# Altium PCB microPower.PcbDoc
Units mil, origin at the board's own origin, x right, y up, seen from the top; angles counter-clockwise.
Board outline 2715 x 2455 mil, 2 copper layers (Top Layer, Bottom Layer); 57 components, 58 nets, 178 pads, 17 vias.
Unrouted connection lines stored in the file: 19.
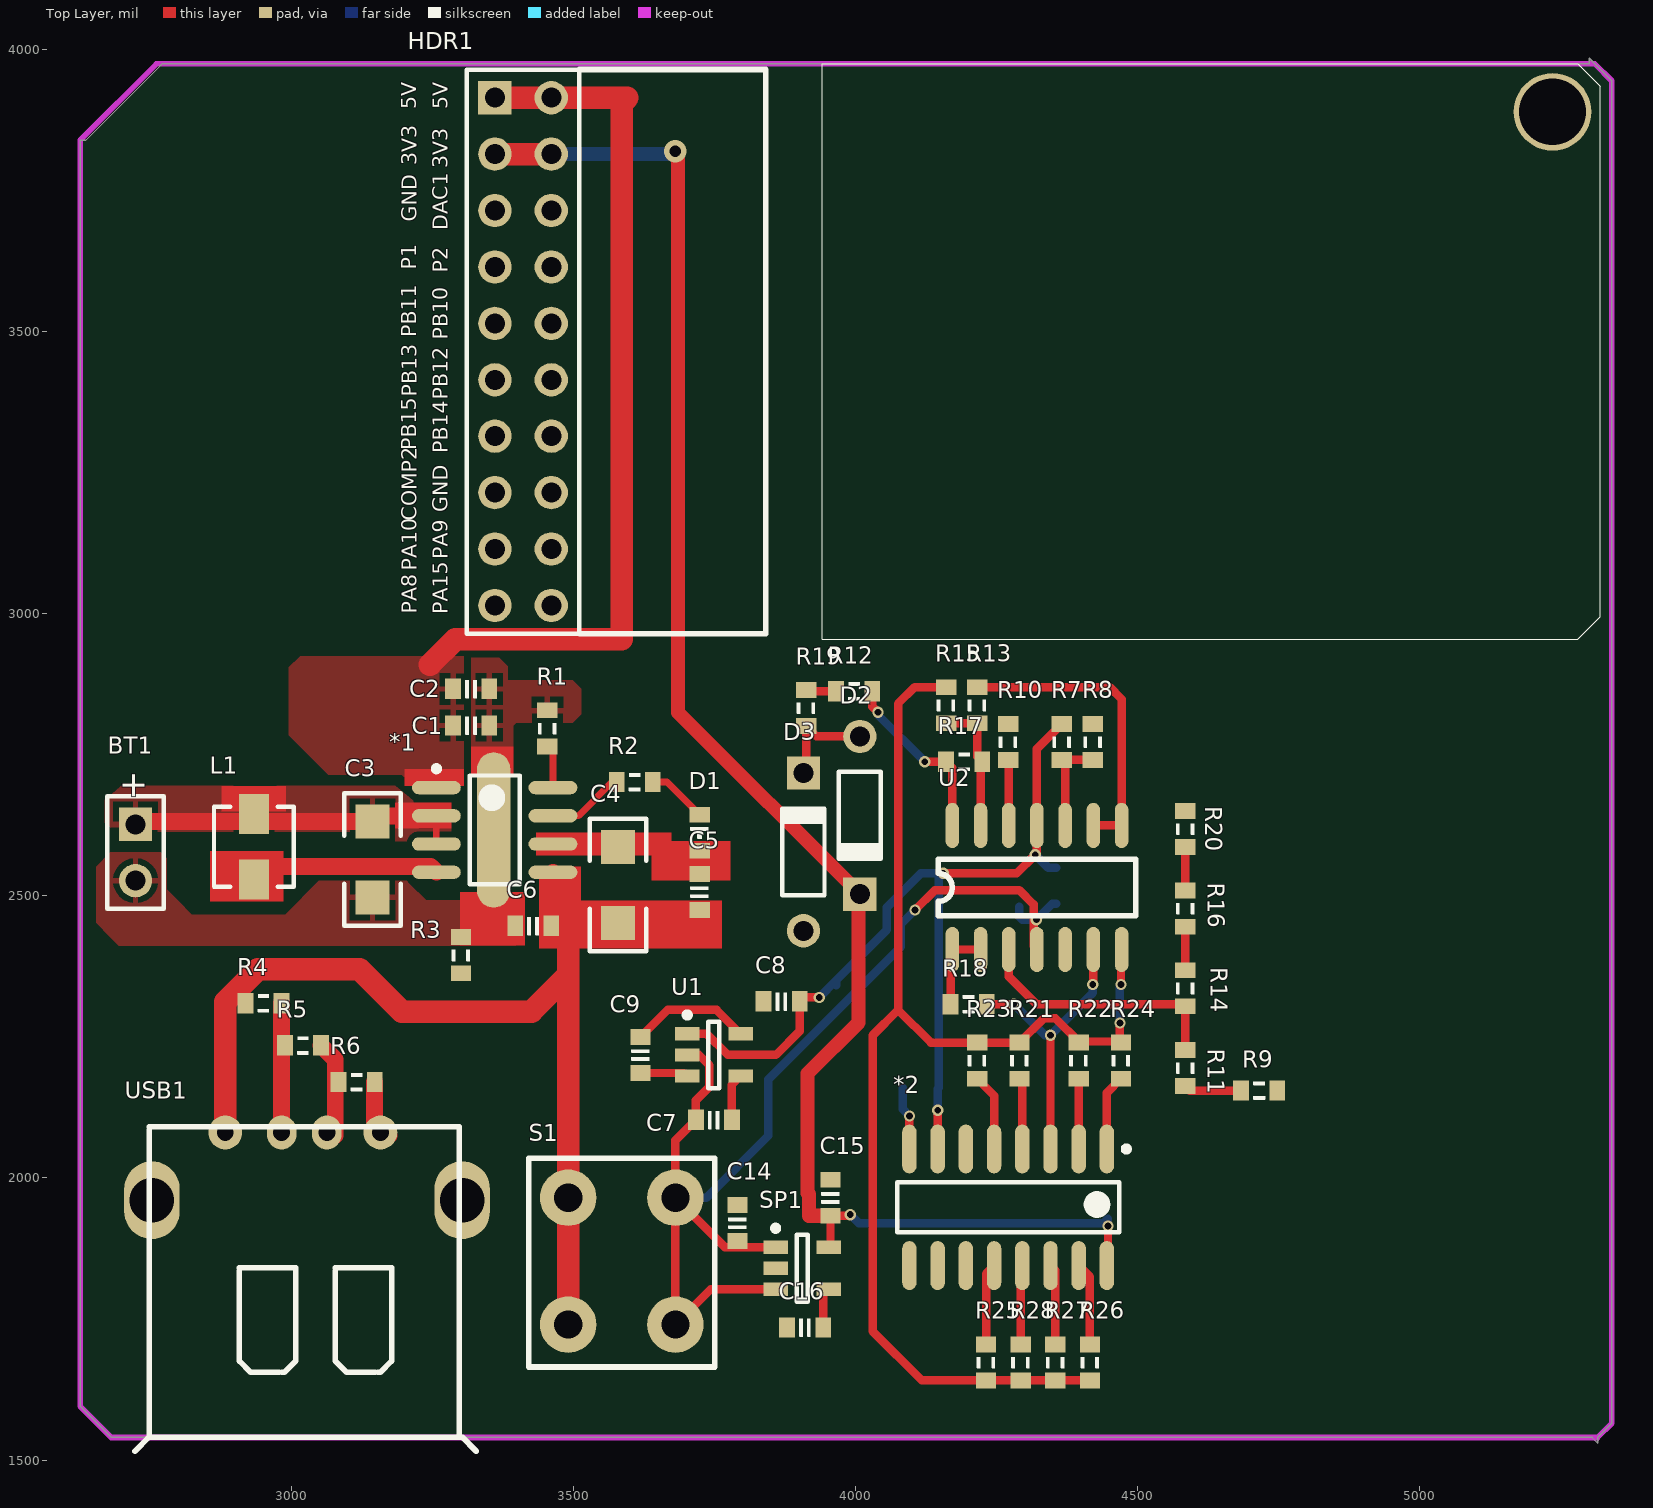
[diagram p0: Top Layer view]
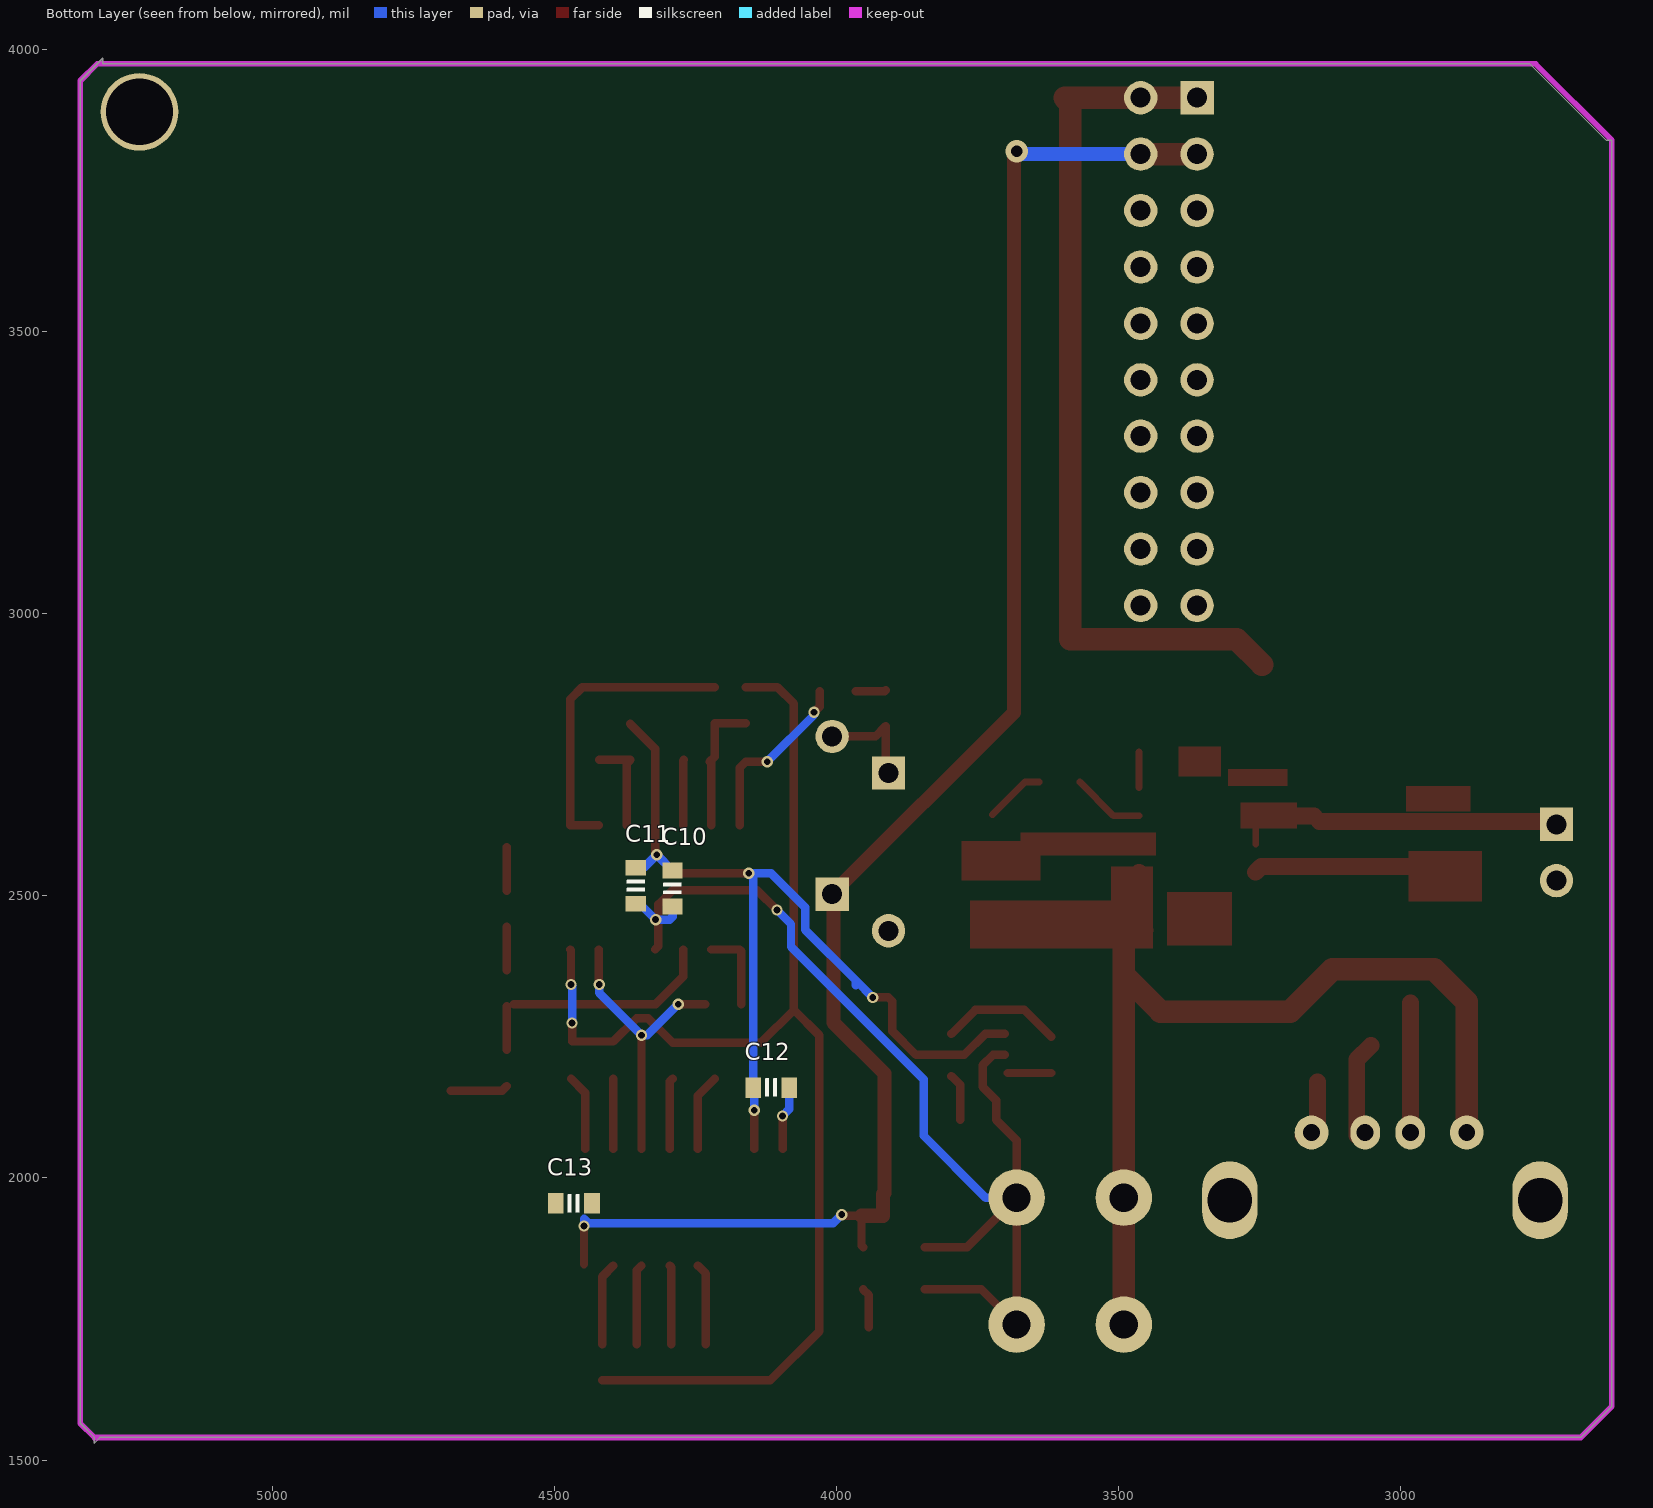
[diagram p1: Bottom Layer view, seen from below]
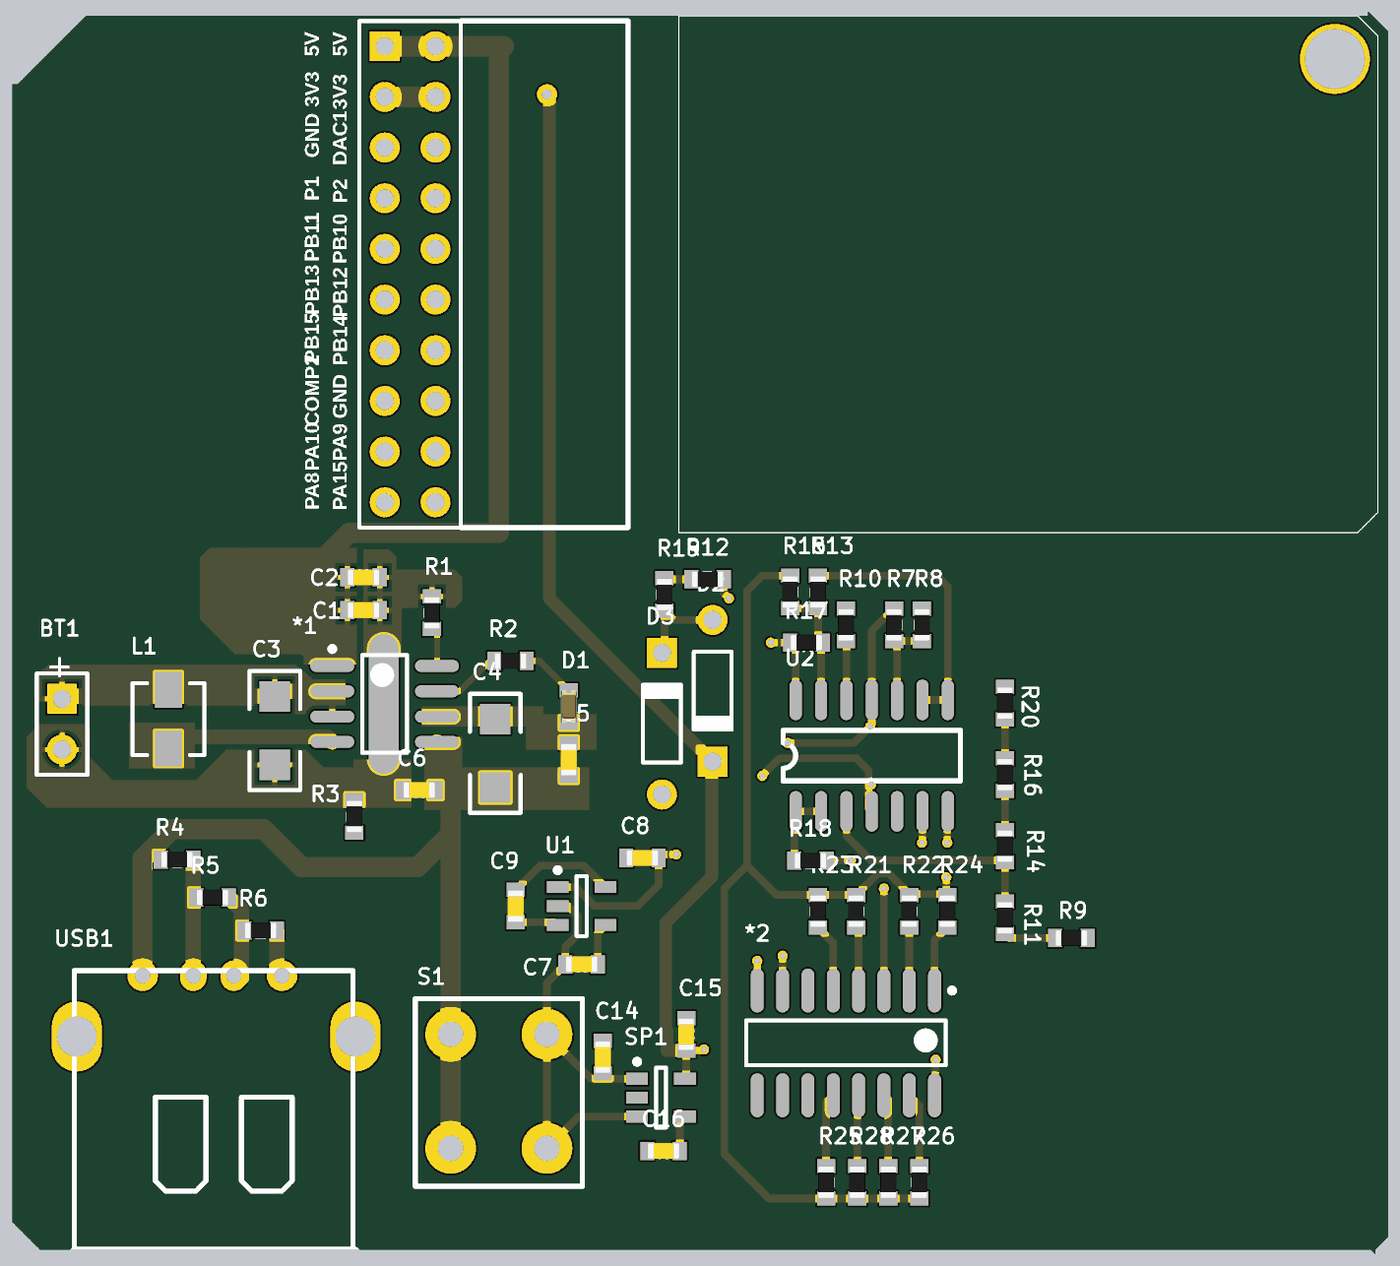
[diagram p2: 3D render of the assembled board from above, using the file's embedded part models]
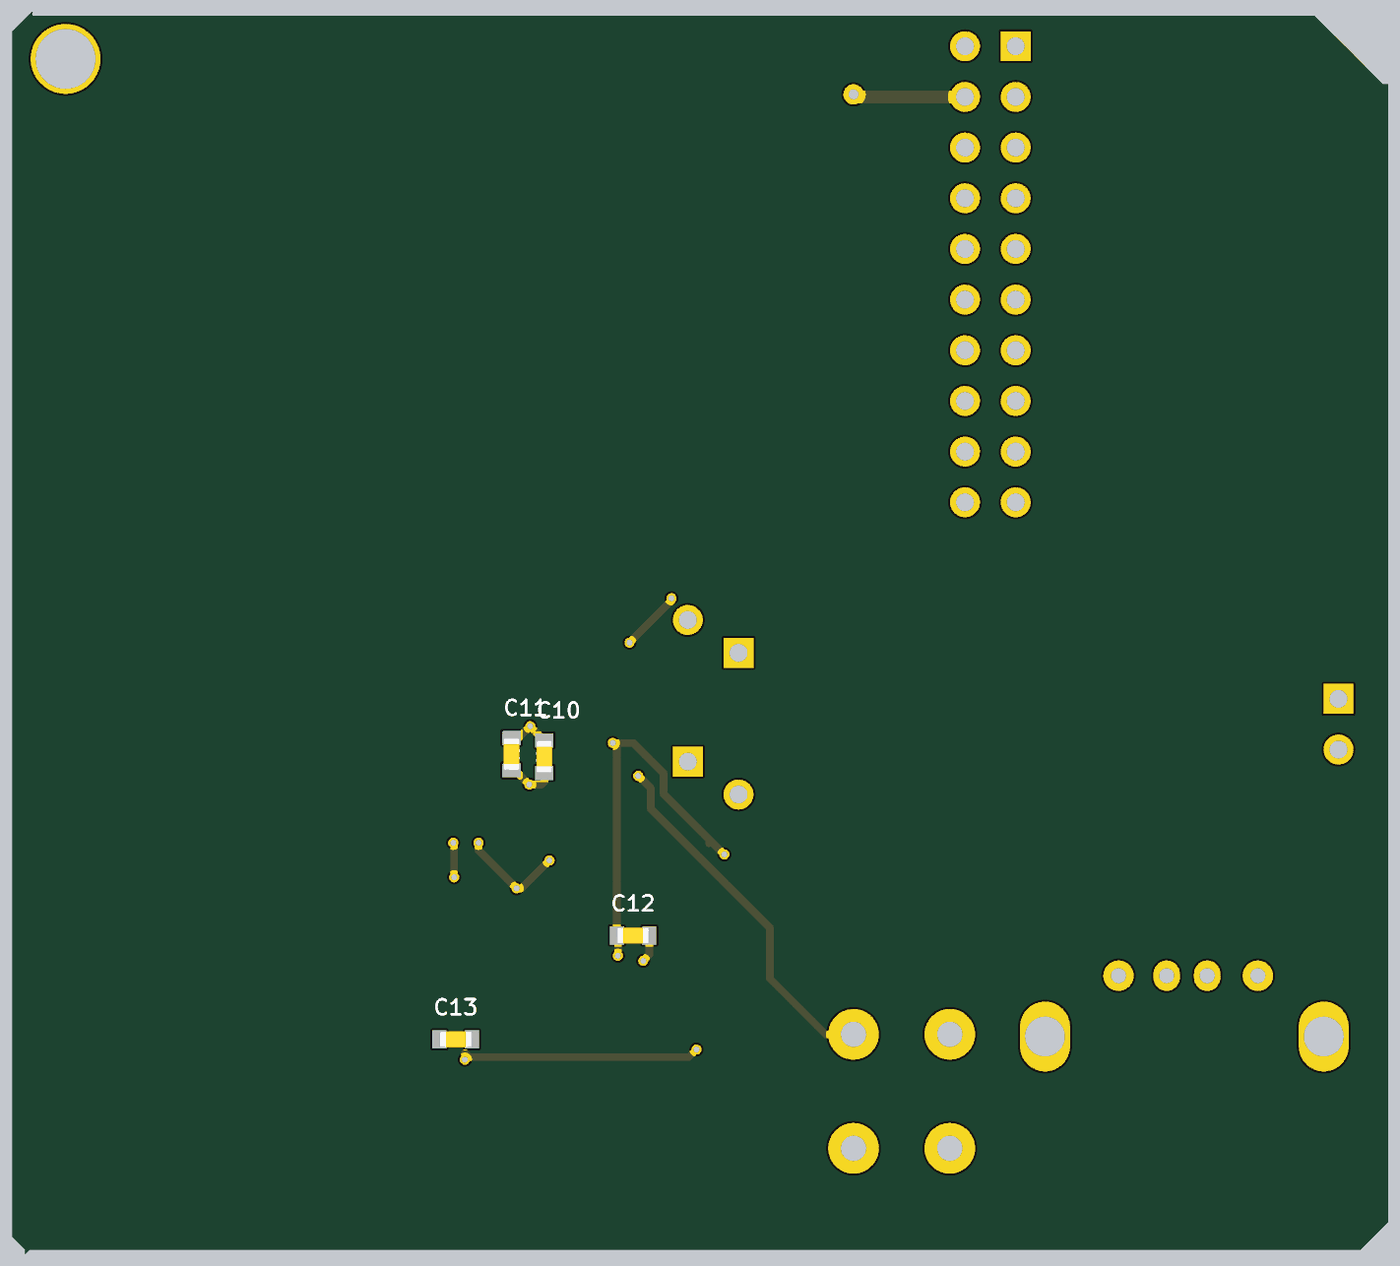
[diagram p3: 3D render of the assembled board from below, using the file's embedded part models]

## Layer stack, top to bottom
Top Layer: signal copper 1.4
Dielectric: dielectric 12.6, FR-4, Dk 4.8
Bottom Layer: signal copper 1.4

## Board outline
2770,3975 2635,3840 2625,3840 2625,1595 2630,1590 2680,1540 5305,1540 5315,1530 5315,1540 5340,1565 5340,3945 5300,3985 5300,3975

## Design rules (kind name [scope] priority, off if disabled: settings)
Clearance [All] p1: gap=10
PolygonConnect [All] p1: connectstyle=Relief reliefconductorwidth=10 reliefentries=4 polygonreliefangle="90 Angle" airgapwidth=10
RoutingVias [All] p1: holewidth=12 width=30 viastyle="Through Hole" minholewidth=10 minwidth=18 maxholewidth=28 maxwidth=50
SolderMaskExpansion [All] p1: expansion=4
Width [All] p1: maxlimit=100 minlimit=8 preferedwidth=12 minimp=50.000000 maximp=50.000000 favimp=50.000000
28 further rules are at their usual default settings.

## Classes and differential pairs
component class U_SP6205: C14 C15 C16 SP1
component class U_OPA4227: *2 C10 C11 C12 C13 D2 D3 R7 R8 R9 R10 R11 R12 R13 R14 R15 R16 R17 R18 R19 R20 R21 R22 R23 R24 R25 R26 R27 R28 U2
component class U_TPS60403: C7 C8 C9 U1
component class U_ETA9640: *1 BT1 C1 C2 C3 C4 C5 C6 D1 L1 R1 R2 R3 R4 R5 R6 S1 USB1
component class U_EXP: HDR1

## Components (designator, comment, footprint, x,y, rotation, side; value= is the part's Value field where it differs from the comment)
*1 "ETA9640" ESOP-8 3463,2542 r0 top
*2 "74HC4051" SOP-16 4270,1948 r270 top
BT1 "Battery" BAT-2 2723,2577 r270 top
C1 "Cap" CAP_0603 3318,2802 r0 top
C2 "Cap" CAP_0603 3318,2867 r0 top
C3 "Cap" 1206 3143,2497 r90 top
C4 "Cap" 1206 3578,2587 r270 top
C5 "Cap" CAP_0603 3723,2507 r90 top
C6 "Cap" CAP_0603 3428,2447 r180 top
C7 "" CAP_0603 3748.34,2103.09 r180 top
C8 "" CAP_0603 3868.34,2313.09 r0 top
C9 "" CAP_0603 3618.34,2218.09 r90 top
C10 "Cap" CAP_0603 4290,2513 r270 bottom
C11 "Cap" CAP_0603 4355,2518 r270 bottom
C12 "Cap" CAP_0603 4115,2160 r180 bottom
C13 "Cap" CAP_0603 4465,1955 r0 bottom
C14 "Cap_0603" CAP_0603 3790,1920 r90 top
C15 "Cap_0603" CAP_0603 3955,1965 r90 top
C16 "Cap_0603" CAP_0603 3910,1735 r180 top
D1 "LED2" LED_0603_RED 3723,2647 r270 top
D2 "Diode 1N4148" DO-35 4007,2643 r270 top
D3 "Diode 1N4148" DO-35 3907,2578 r90 top
HDR1 "HDR2x10_2.54" HDR2X10_2.54_180HF 3460,3915 r0 top
L1 "Inductor" VLF4012_2R2 2933,2587 r270 top
R1 "Res2" RES_0603 3453,2797 r270 top
R2 "Res2" RES_0603 3608,2702 r180 top
R3 "Res2" RES_0603 3300,2395 r90 top
R4 "Res2" RES_0603 2950,2310 r180 top
R5 "Res2" RES_0603 3020,2235 r180 top
R6 "Res2" RES_0603 3115,2170 r180 top
R7 "Res3" RES_0603 4365,2773 r90 top
R8 "Res3" RES_0603 4420,2773 r270 top
R9 "Res3" RES_0603 4715,2155 r0 top
R10 "Res3" RES_0603 4270,2773 r270 top
R11 "Res3" RES_0603 4584,2195 r270 top
R12 "Res3" RES_0603 3997,2863 r180 top
R13 "Res3" RES_0603 4215,2838 r270 top
R14 "Res3" RES_0603 4584,2336.25 r270 top
R15 "Res3" RES_0603 4160,2838 r270 top
R16 "Res3" RES_0603 4584,2477.5 r270 top
R17 "Res3" RES_0603 4192,2738 r180 top
R18 "Res3" RES_0603 4200,2308 r0 top
R19 "Res3" RES_0603 3912,2833 r270 top
R20 "Res3" RES_0603 4584,2618.75 r270 top
R21 "Res3" RES_0603 4290,2208 r90 top
R22 "Res3" RES_0603 4395,2208 r90 top
R23 "Res3" RES_0603 4215,2208 r90 top
R24 "Res3" RES_0603 4470,2208 r90 top
R25 "Res3" RES_0603 4230.86,1673 r270 top
R26 "Res3" RES_0603 4415,1673 r270 top
R27 "Res3" RES_0603 4353.62,1673 r270 top
R28 "Res3" RES_0603 4292.24,1673 r270 top
S1 "SW-SPST" SB-4 3490,1965 r270 top
SP1 "SP6205" SOT23-5 3905,1840 r0 top
U1 "TPS60403" SOT23-5 3748.34,2218.09 r0 top
U2 "OPA4277" SO-14 4095,2263 r90 top
USB1 "USB" USB 3030,1795 r270 top

## Footprints (in the part's own frame and the unit in brackets; to place one, negate y for a bottom-side part, rotate by r counter-clockwise, add the part's x,y. Pads: shape width x height; smd on the part's side, far side on the other; paste and mask are expansions set on the pad)
1206 [mil]
  rect 60x60 smd: 1(0,0) 2(135,0)
  silkscreen extent -50,-50 185,50
BAT-2 [mm] "Battery; 2 Leads"
  rect 1.5x1.5 hole 0.9: 1(-1.27,0)
  round 1.5 hole 0.9: 2(1.27,0)
  silkscreen extent -2.54,-1.27 2.54,1.27
CAP_0603 [mil]
  rect 28x36 smd: 1(32,0) 2(-32,0)
  silkscreen extent -10,-16 10,16, body extent -31,-16 31,16, height 36
DO-35 [mm] "Diode, Axial; Body 3.8 x 1.9 mm (LxDia. max), Lead Dia. 0.53 mm (max)"
  round 1.5 hole 0.9: 1(-3.55,0)
  rect 1.5x1.5 hole 0.9: 2(3.55,0)
  silkscreen extent -1.95,-0.95 2.05,0.95
ESOP-8 [mm] "SOP, 8-Leads, Body 4.9x3.9mm (max), Pitch 1.27mm, IPC Medium Density"
  oval 2.2x0.6 smd: 1(-5.25,3.81) 2(-5.25,2.54) 3(-5.25,1.27) 4(-5.25,0) 5(0,0) 6(0,1.27) 7(0,2.54) 8(0,3.81)
  oval 1.5x7 smd: 9(-2.667,1.905)
  silkscreen extent -5.37,-0.55 -1.5,4.78, body extent -4.58,-0.55 -0.68,4.36, height 1.75
HDR2X10_2.54_180HF [mm]
  round 1.5 hole 0.9: 1(0,0) 3(0,-2.54) 4(-2.54,-2.54) 5(0,-5.08) 6(-2.54,-5.08) 7(0,-7.62) 8(-2.54,-7.62) 9(0,-10.16) 10(-2.54,-10.16) 11(0,-12.7) 12(-2.54,-12.7) 13(0,-15.24) 14(-2.54,-15.24) 15(0,-17.78) 16(-2.54,-17.78) 17(0,-20.32) 18(-2.54,-20.32) 19(0,-22.86) 20(-2.54,-22.86)
  rect 1.5x1.5 hole 0.9: 2(-2.54,0)
  round 3.5 hole 3: 6(45.085,-0.635)
  silkscreen extent -3.81,-24.38 47.24,1.52
LED_0603_RED [mil]
  rect 28x36 smd: 1(3,0) 2(67,0)
  silkscreen extent 25,-15 44,16, body extent 3,-16 67,16, height 24
RES_0603 [mil]
  rect 28x36 smd: 1(-32,0) 2(32,0)
  silkscreen extent -10,-16 10,16, body extent -31,-16 32,16, height 20
SB-4 [mil]
  round 100 hole 50: 1(0,0) 1(225,0) 2(0,190) 2(225,190)
  silkscreen extent -70,-70 300,260
SO-14 [mil]
  oval 80x24 smd: 1(142,-76) 2(142,-126) 3(142,-176) 4(142,-226) 5(142,-276) 6(142,-326) 7(142,-376) 8(362,-376) 9(362,-326) 10(362,-276) 11(362,-226) 12(362,-176) 13(362,-126) 14(362,-76)
  silkscreen extent 202,-401 302,-51
SOP-16 [mm] "SOP, 16-Leads, Body 10.0x8.9mm (max), Pitch 1.27mm, IPC Medium Density"
  oval 2.2x0.65 smd: 1(-2.625,4.445) 2(-2.625,3.175) 3(-2.625,1.905) 4(-2.625,0.635) 5(-2.625,-0.635) 6(-2.625,-1.905) 7(-2.625,-3.175) 8(-2.625,-4.445) 9(2.625,-4.445) 10(2.625,-3.175) 11(2.625,-1.905) 12(2.625,-0.635) 13(2.625,0.635) 14(2.625,1.905) 15(2.625,3.175) 16(2.625,4.445)
  silkscreen extent -2.75,-5 1.12,5.45, body extent -1.13,-5 1.12,5, height 1.75
SOT23-5 [mm] "SOT23, 5-Leads, Body 3.0x3.0mm (max), Pitch 0.95mm, IPC Medium Density"
  rect 1.1x0.6 smd: 1(-1.2,0.95) 2(-1.2,0) 3(-1.2,-0.95) 4(1.2,-0.95) 5(1.2,0.95)
  silkscreen extent -1.32,-1.5 0.25,1.92, body extent -0.85,-1.5 0.85,1.5, height 1.1
USB [mm]
  round 1.524 hole 0.762: +(-7.255,-3.757) -(-7.255,3.228)
  oval 1.524x1.324 hole 0.762: DM(-7.255,-1.217) DP(-7.255,0.815)
  oval 3.5x2.5 hole 2: VSS(-4.207,6.911) VSS2(-4.207,-7.059)
  silkscreen extent -7.51,-7.82 7.1,7.55
VLF4012_2R2 [mm] "Precision Wire Wound Inductor, 2-Leads, Body 3.6x3.6mm, IPC Medium Density"
  rect 1.8x1.35 smd: 1(-1.475,0) 2(1.475,0)
  silkscreen extent -1.8,-1.8 1.8,1.8, body extent -1.8,-1.8 1.8,1.8, height 4

## Part data
BT1: "Multicell Battery"
C1 C2 C3 C4 C5 C6 C10 C11 C12 C13 C14 C15 C16: "Capacitor"
C7 C8 C9: library part "Cap Semi", "Capacitor (Semiconductor SIM Model)"
D1: "Typical RED, GREEN, YELLOW, AMBER GaAs LED"
D2 D3: "High Conductance Fast Diode"
HDR1: "Header"
R1 R2 R3 R4 R5 R6 R7 R8 R9 R10 R11 R12 R13 R14 R15 R16 R17 R18 R19 R20 R21 R22 R23 R24 R25 R26 R27 R28: "Resistor"
S1: "Single-Pole, Single-Throw Switch"
SP1: "Power"
U1: library part Component_1
U2: "High Precision Operational Amplifiers"

## Via types
v1: diameter 20, hole 12, Top Layer to Bottom Layer, 16 vias
v2: diameter 40, hole 20, Top Layer to Bottom Layer, 1 vias

## Nets (pads, with @x,y where several pads share a name; then routed paths per layer and width w, separated by ;. In a path a pad name is that pad's centre, name@x,y a point inside that pad or via, vN(x,y) a via of type N, cw(c..) or ccw(c..) an arc to the next point about the centre after c; other vN are vias at no path point)
3.3V: *2.16 C13.2 C15.2 D2.2 HDR1.3 HDR1.4 SP1.5 | length 3065.2
  Top Layer w15: SP1.5 3955,1880.16 C15.2 3988,1933 v1(3990,1935) ; D2.2@4005,2501.24 D2.2 ; *2.16@4447,1846.65 v1(4447,1915)
  Top Layer w25: v2(3680,3820) 3685,3820 3685,2825.24 D2.2 ; C15.2 3917,1933 3917,1971.18 3914.5,1973.68 3914.5,2184.93 4005,2275.43 D2.2@4005,2501.24
  Top Layer w40: HDR1.4 HDR1.3
  Bottom Layer w15: v1(3990,1935) 4005,1920 4439,1920 4447,1928 v1(4447,1915)
  Bottom Layer w25: HDR1.3 3675,3815 v2(3680,3820)
5V: C7.1 C10.1 C11.1 C14.2 S1.2 SP1.1 SP1.3 U1.2 U2.4 | length 2051.4
  Top Layer w15: U1.2 3721.91,2218.09 3740.25,2199.75 3740.25,2161.63 3716.34,2137.72 C7.1 3680,2066.75 S1.2@3680,1965 ; SP1.3@3842.76,1802.6 3742.6,1802.6 3680,1740 S1.2@3680,1965 ; SP1.1@3842.76,1877.4 3767.6,1877.4 S1.2@3680,1965 ; v1(4105,2475) 4140,2510 4290,2510 4315,2485 4315,2411 U2.4
  Bottom Layer w15: S1.2@3680,1965 3735,1965 3845,2075 3845,2175 4080,2410 4080,2450 v1(4105,2475) ; C10.1 4290,2463 4295,2458 v1(4320,2458) 4348,2486 C11.1
-5V: *2.7 C8.1 C10.2 C11.2 C12.2 R7.2 U1.1 U2.11 | length 1672.3
  Top Layer w15: U1.1 3735.74,2255.49 3773.14,2218.09 3858.34,2218.09 3900.34,2260.09 C8.1 3907.25,2320 v1(3935,2320) ; *2.7 v1(4145,2120) ; v1(4155,2540) 4285,2540 v1(4318,2573) 4321,2576 U2.11 4321,2761 R7.2
  Bottom Layer w15: v1(3935,2320) 3965,2350 ; 3965,2342 3965,2350 ; v1(4145,2120) 4145,2158 C12.2 4147,2532 v1(4155,2540) 4115,2540 4055,2480 4055,2440 3965,2350 ; C10.2 v1(4318,2573) 4341,2550 C11.2
BAT+: *1.2 *1.3 BT1.1 C3.2 L1.1 | length 568.3
  Top Layer w12: *1.3 *1.2
  Top Layer w30: BT1.1@2728,2632 C3.2 ; C3.2@3153,2642 *1.2
GND: *1.6 *2.8 C4.1 C5.1 C7.2 C8.2 C12.1 C13.1 C14.1 C15.1 C16.1 D1.2 D3.1 HDR1.6 HDR1.15 R3.1 R6.1 R8.1 R10.1 R20.1 SP1.2 U1.4 U2.5 USB1.- | length 302.3
  Top Layer w15: C7.2 3780.34,2165.44 U1.4 ; *2.8 v1(4095,2110)
  Top Layer w30: R6.1 3147,2100.72 USB1.-@3172.09,2075.63
  Bottom Layer w15: C12.1 4083,2122 v1(4095,2110)
GND_S: *1.9 BT1.2 C1.1 C2.1 C3.1 C6.1 R1.1 R3.2
Net*1_1: *1.1 C1.2 C2.2 HDR1.1 HDR1.2 | length 1557.8
  Top Layer w40: 3245,2910 3290,2955 3585,2955 3585,3905 3595,3915 HDR1.1 HDR1.2
Net*1_4: *1.4 L1.2 | length 337
  Top Layer w30: L1.2 2956.07,2552 3246.31,2552 *1.4
Net*1_5: *1.5 C4.2 C5.2 C6.2 R4.2 S1.1 USB1.+ | length 1738.8
  Top Layer w30: C6.2@3452.09,2439.09 C6.2 3460,2539 *1.5
  Top Layer w40: USB1.+ 2882.09,2312.09 2940,2370 3120,2370 3195,2295 3425,2295 3490,2360 ; S1.1@3490,1740 3490,1965 3490,2360 ; 3490,2450 3490,2360
Net*1_7: *1.7 R2.2 | length 129.9
  Top Layer w12: *1.7 3508,2642 R2.2@3568,2702
Net*1_8: *1.8 R1.2 | length 63
  Top Layer w12: *1.8 R1.2@3463,2755
Net*2_1: *2.1 R24.1 | length 135
  Top Layer w15: *2.1 4445,2151 R24.1
Net*2_2: *2.2 R22.1 | length 124.7
  Top Layer w15: *2.2 R22.1
Net*2_3: *2.3 R18.2 U2.6 | length 520.5
  Top Layer w15: R18.2 v1(4280,2308) ; *2.3 v1(4345,2253) ; v1@4421,2343 U2.6
  Bottom Layer w15: v1(4280,2308) 4335,2253 v1(4345,2253) 4420,2328 v1(4420,2343)
Net*2_4: *2.4 R21.1 | length 126.7
  Top Layer w15: R21.1 4295,2171 *2.4
Net*2_5: *2.5 R23.1 | length 137.1
  Top Layer w15: R23.1 4245,2146 *2.5
Net*2_6: *2.6
Net*2_9: *2.9
Net*2_10: *2.10
Net*2_11: *2.11
Net*2_12: *2.12 R25.1 | length 145.5
  Top Layer w15: R25.1 4230.86,1830.51 *2.12
Net*2_13: *2.13 R28.1 | length 140.8
  Top Layer w15: R28.1 4292.24,1841.89 *2.13
Net*2_14: *2.14 R27.1 | length 143.2
  Top Layer w15: *2.14 4353.62,1836.03 R27.1
Net*2_15: *2.15 R26.1 | length 147.9
  Top Layer w15: *2.15 4414.7,1824.95 4414.7,1705.3 R26.1
NetC9_1: C9.1 U1.5 | length 214.8
  Top Layer w15: C9.1 3666.34,2298.09 3752.99,2298.09 U1.5
NetC9_2: C9.2 U1.3 | length 77.4
  Top Layer w15: C9.2 U1.3@3695.7,2186.09
NetC16_2: C16.2 SP1.4 | length 71.8
  Top Layer w15: C16.2 3942,1792.35 SP1.4
NetD1_1: D1.1 R2.1 | length 107
  Top Layer w12: R2.1 3665,2702 D1.1
NetD2_1: D2.1 D3.2 R19.2 | length 187.9
  Top Layer w15: D3.2 3912,2722.76 R19.2 3930.24,2782.76 D2.1
NetHDR1_5: HDR1.5
NetHDR1_7: HDR1.7
NetHDR1_8: HDR1.8
NetHDR1_9: HDR1.9
NetHDR1_10: HDR1.10
NetHDR1_11: HDR1.11
NetHDR1_12: HDR1.12
NetHDR1_13: HDR1.13
NetHDR1_14: HDR1.14
NetHDR1_16: HDR1.16
NetHDR1_17: HDR1.17
NetHDR1_18: HDR1.18
NetHDR1_19: HDR1.19
NetHDR1_20: HDR1.20
NetR4_1: R4.1 R5.2 USB1.DM | length 219.3
  Top Layer w30: USB1.DM@2982,2090.72 R4.1
NetR5_1: R5.1 R6.2 USB1.DP | length 169.8
  Top Layer w30: R5.1 3077.09,2209.91 USB1.DP@3077.09,2075.63
NetR7_1: R7.1 R8.2 U2.10 | length 173.5
  Top Layer w15: U2.10 4371,2735 R7.1 R8.2
NetR9_1: R9.1 R11.2 | length 102.3
  Top Layer w15: R11.2 4592,2155 R9.1
NetR9_2: R9.2
NetR10_2: R10.2 U2.12 | length 116.4
  Top Layer w15: R10.2 4271,2740 U2.12
NetR11_1: R11.1 R14.2 U2.3 | length 445.8
  Top Layer w15: U2.3 4271,2357 4320,2308 R14.2@4571.25,2308 ; R11.1 R14.2
NetR12_1: R12.1 R17.2 U2.14 | length 319.1
  Top Layer w15: R12.1 4029,2835.75 v1(4039.25,2825.5) ; v1(4122,2738) R17.2 4171,2727 U2.14
  Bottom Layer w15: v1(4039.25,2825.5) 4039.25,2820.75 v1(4122,2738)
NetR12_2: R12.2 R19.1 | length 53.8
  Top Layer w15: R19.1 3914,2863 R12.2
NetR13_1: R13.1 U2.8 U2.9 | length 538.7
  Top Layer w15: R13.1 4450,2870 4471,2849 U2.8 U2.9
NetR13_2: R13.2 R15.2 R17.1 U2.13 | length 241
  Top Layer w15: R15.2 R13.2 4215,2747 R17.1 4221,2735 U2.13
NetR14_1: R14.1 R16.2 | length 77.2
  Top Layer w15: R14.1 R16.2
NetR15_1: R15.1 R21.2 R22.2 R23.2 R24.2 R25.2 R26.2 R27.2 R28.2 U2.7 | length 2266
  Top Layer w15: R15.1 4104,2870 4075,2841 4075,2298 ; R26.2 R27.2 R28.2 R25.2 4117,1641 4030,1728 4030,2253 4075,2298 ; v1(4468.11,2274.89) 4468.11,2241.89 4395,2241.89 4353.89,2283 4333,2283 R21.2 R23.2 4133,2240 4075,2298 ; v1(4470,2343) 4470,2404 U2.7
  Bottom Layer w15: v1(4468.11,2274.89) 4468.11,2341.11 v1(4470,2343)
NetR16_1: R16.1 R20.2 | length 77.2
  Top Layer w15: R16.1 R20.2
NetR18_1: R18.1 U2.1 U2.2 | length 148.2
  Top Layer w15: R18.1 4168,2402 U2.1 U2.2
pads on no net: USB1.VSS USB1.VSS2

## Polygon pours and split planes (outlines as drawn)
Net*1_1 on Top Layer "Top Layer-No Net" (solid, remove dead copper, pour order 8): 3220,2690 3195,2715 3150,2715 3065,2715 2995,2785 2995,2905 3015,2925 3200,2925
Net*1_1 on Top Layer "Top Layer-No Net" (solid, remove dead copper, pour order 6): 3195,2915 3200,2910 3200,2665 3295,2665 3305,2675 3305,2925 3200,2925
BAT+ on Top Layer "Top Layer-No Net" (solid, pour order 4): 3283,2597 3188,2597 3178,2597 3163,2609.25 3158,2613.33 3058,2613.33 2688,2613.33 2683,2617.42 2668,2629.67 2668,2670.5 2688,2686.83 2698,2695 3173,2695 3183,2695 3208,2674.58 3218,2666.42 3273,2666.42 3283,2666.42
GND_S on Top Layer "Top Layer-No Net" (solid, pour order 2): 3318,2922 3318,2737 3318,2507 3313,2502 3303,2492 3238,2492 3208,2522 3198,2532 3073,2532 3053,2532 2988,2467 2823,2467 2798,2492 2778,2512 2778,2567 2768,2577 2678,2577 2653,2552 2653,2452 2678,2427 2693,2412 3503,2412 3398,2412 3428,2442 3428,2457 3403,2482 3393,2492 3393,2797 3393,2802 3398,2807 3493,2807 3498,2807 3513,2822 3513,2867 3498,2882 3383,2882 3383,2907 3368,2922

## Keep-outs
Keep-Out Layer:
  lines w10: 2625,1595 2680,1540 5300,1540 5315,1540 5340,1565 5340,3945 5310,3975 2760,3975 2625,3840 2625,1595

## Other copper
Top Layer:
  rectangle net Net*1_4: 2855,2490 2985,2580
  rectangle net BAT+: 2875,2650 2990,2695
  rectangle net Net*1_1: 3200,2695 3305,2725
  rectangle net GND: 3648,2527 3778,2597
  rectangle net GND: 3638,2527 3673,2607
  rectangle net GND: 3433,2572 3673,2612
  rectangle net Net*1_5: 3658,2407 3763,2492
  rectangle net Net*1_5: 3483,2407 3658,2492
  rectangle net Net*1_5: 3438,2407 3513,2552
  rectangle net BAT+: 3183,2619.76 3283,2665.79
  rectangle net GND_S: 3318,2712 3393,2764.48
  rectangle net GND_S: 3298,2412 3413,2507

## Text inside footprints (layer, text, board x,y; h text height)
BT1: Top Overlay "+" at 2700.28,2721.49 h45.28 r270
HDR1: Top Overlay "5V" at 3229.65,3895 h45 r90; Top Overlay "P1" at 3229.65,3610 h45 r90; Top Overlay "COMP2" at 3230,3165 h45 r90; Top Overlay "PA10" at 3230,3076.65 h45 r90; Top Overlay "3V3" at 3230,3795 h45 r90; Top Overlay "PB11" at 3229.65,3490 h45 r90; Top Overlay "PB13" at 3230,3385 h45 r90; Top Overlay "PB15" at 3229.65,3290 h45 r90; Top Overlay "GND" at 3230,3695 h45 r90; Top Overlay "PA8" at 3229.96,3000 h45 r90; Top Overlay "PA15" at 3285,2999.45 h45 r90; Top Overlay "3V3" at 3285,3790 h45 r90; Top Overlay "GND" at 3285,3180 h45 r90; Top Overlay "DAC1" at 3285,3680 h45 r90; Top Overlay "P2" at 3285.31,3605 h45 r90; Top Overlay "PB10" at 3285,3485.56 h45 r90; Top Overlay "PB12" at 3285.31,3380 h45 r90; Top Overlay "PB14" at 3285.31,3285 h45 r90; Top Overlay "PA9" at 3285,3096.67 h45 r90; Top Overlay "5V" at 3285,3895 h45 r90